# Altium PCB Macropad2023.PcbDoc
Units mil, origin at the board's own origin, x right, y up, seen from the top; angles counter-clockwise.
Board outline 6000 x 4000 mil, 2 copper layers (Top Layer, Bottom Layer); 26 components, 22 nets, 183 pads, 0 vias.
Unrouted connection lines stored in the file: 25.
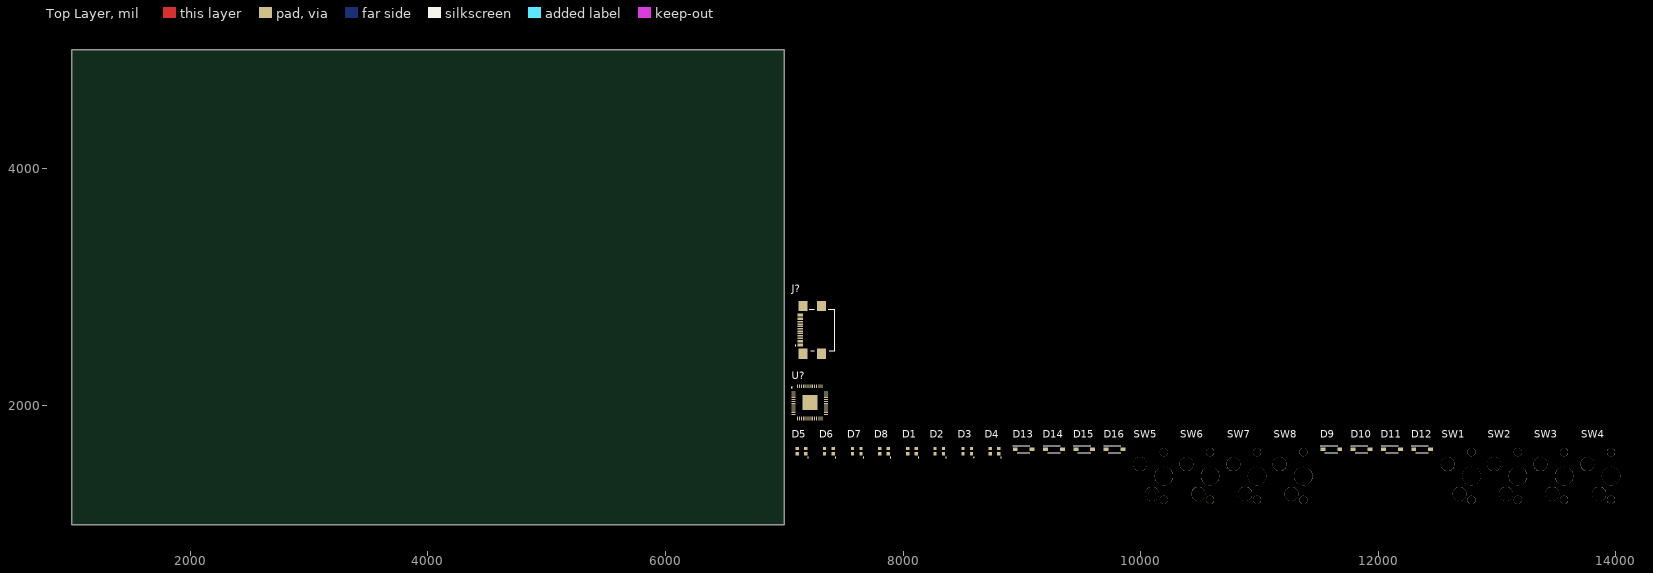
[diagram p0: Top Layer view]
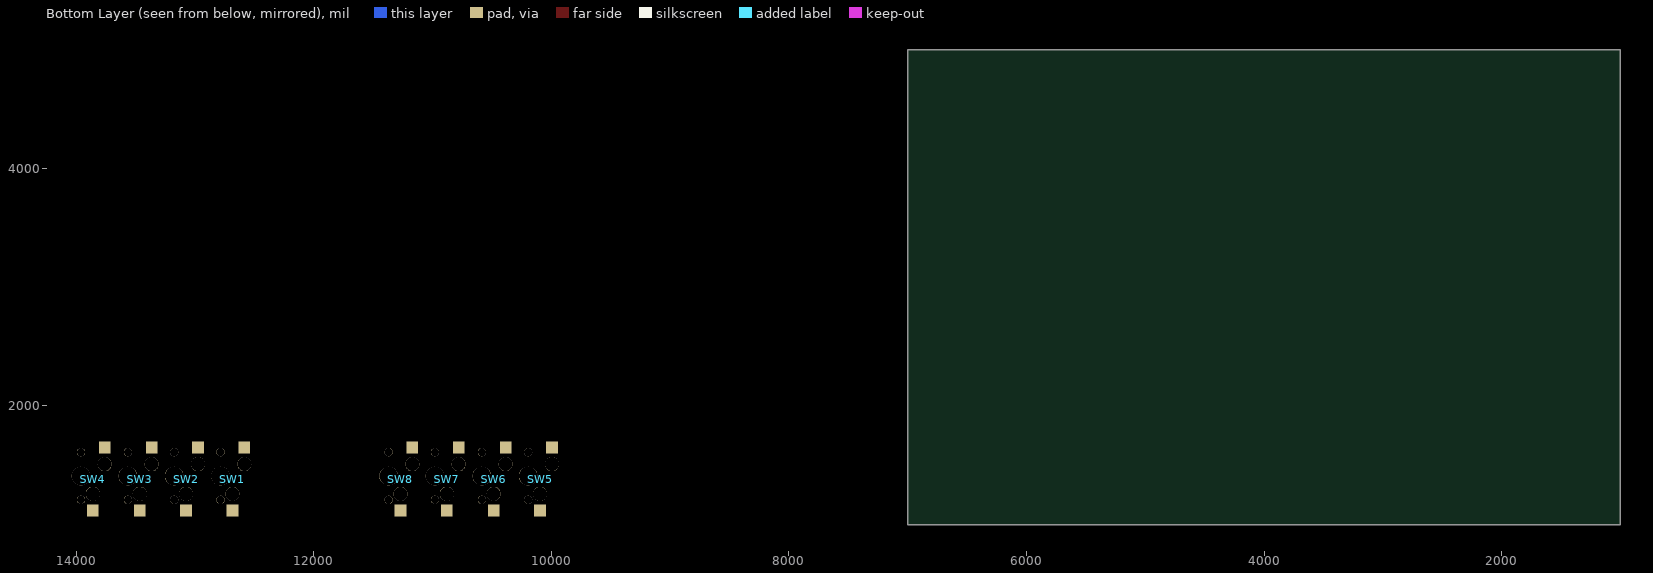
[diagram p1: Bottom Layer view, seen from below]

## Layer stack, top to bottom
Top Solder: solder mask 0.4, Solder Resist, Dk 3.5
Top Layer: signal copper 1.4
Dielectric 1: dielectric 12.6, FR-4, Dk 4.8
Bottom Layer: signal copper 1.4
Bottom Solder: solder mask 0.4, Solder Resist, Dk 3.5

## Board outline
1000,1000 7000,1000 7000,5000 1000,5000

## Design rules (kind name [scope] priority, off if disabled: settings)
Clearance [All] p1: gap=10 ignorepadtopadclearanceinfootprint=FALSE except(0: Arc-Hole Track-Hole SMDPad-Hole THPad-Hole Via-Hole Fill-Hole Poly-Hole Region-Hole Text-Hole)
PolygonConnect [All] p1: connectstyle=Relief reliefconductorwidth=10 reliefentries=4 polygonreliefangle="90 Angle" airgapwidth=10
RoutingVias [All] p1: holewidth=28 width=50 viastyle="Through Hole" minholewidth=28 minwidth=50 maxholewidth=28 maxwidth=50
SolderMaskExpansion [All] p1: expansion=4 istentingtop=FALSE
Width [All] p1: maxlimit=10 minlimit=10 preferedwidth=10
30 further rules are at their usual default settings.

## Classes and differential pairs
component class "Title Block": *
component class MCU: * U?

## Components (designator, comment, footprint, x,y, rotation, side; value= is the part's Value field where it differs from the comment)
D1 "WS2812B-2020" WS2812B2020 8075,1620 r0 top
D2 "WS2812B-2020" WS2812B2020 8305,1620 r0 top
D3 "WS2812B-2020" WS2812B2020 8540,1620 r0 top
D4 "WS2812B-2020" WS2812B2020 8770,1620 r0 top
D5 "WS2812B-2020" WS2812B2020 7145,1620 r0 top
D6 "WS2812B-2020" WS2812B2020 7375,1620 r0 top
D7 "WS2812B-2020" WS2812B2020 7610,1620 r0 top
D8 "WS2812B-2020" WS2812B2020 7840,1620 r0 top
D9 "1N4148W-TP" SOD3715X135N 11605,1635 r0 top
D10 "1N4148W-TP" SOD3715X135N 11860,1635 r0 top
D11 "1N4148W-TP" SOD3715X135N 12115,1635 r0 top
D12 "1N4148W-TP" SOD3715X135N 12370,1635 r0 top
D13 "1N4148W-TP" SOD3715X135N 9015,1635 r0 top
D14 "1N4148W-TP" SOD3715X135N 9270,1635 r0 top
D15 "1N4148W-TP" SOD3715X135N 9525,1635 r0 top
D16 "1N4148W-TP" SOD3715X135N 9780,1635 r0 top
J? "USB4110-GF-A" USB4110GFA 7280,2640 r90 top
SW1 "Cherry-MX" CHERRYMX_1.00U_HOTSWAP_NOSILK 12785,1410 r90 top
SW2 "Cherry-MX" CHERRYMX_1.00U_HOTSWAP_NOSILK 13175,1410 r90 top
SW3 "Cherry-MX" CHERRYMX_1.00U_HOTSWAP_NOSILK 13565,1410 r90 top
SW4 "Cherry-MX" CHERRYMX_1.00U_HOTSWAP_NOSILK 13960,1410 r90 top
SW5 "Cherry-MX" CHERRYMX_1.00U_HOTSWAP_NOSILK 10195,1410 r90 top
SW6 "Cherry-MX" CHERRYMX_1.00U_HOTSWAP_NOSILK 10585,1410 r90 top
SW7 "Cherry-MX" CHERRYMX_1.00U_HOTSWAP_NOSILK 10980,1410 r90 top
SW8 "Cherry-MX" CHERRYMX_1.00U_HOTSWAP_NOSILK 11370,1410 r90 top
U? "SC0914_7_" QFN40P700X700X90-57N-D 7215,2030 r0 top

## Footprints (in the part's own frame and the unit in brackets; to place one, negate y for a bottom-side part, rotate by r counter-clockwise, add the part's x,y. Pads: shape width x height; smd on the part's side, far side on the other; paste and mask are expansions set on the pad)
CHERRYMX_1.00U_HOTSWAP_NOSILK [mm]
  rect 2.55x2.5 smd far side: 1(-7.36,2.54) 2(6.09,5.08)
  round 1.75 hole 1.75 mask+0.05: ""(-5.08,0) ""(5.08,0)
  round 3 hole 3 mask+0.05: ""(-3.81,2.54) ""(2.54,5.08)
  round 4 hole 4 mask+0.05: ""(0,0)
QFN40P700X700X90-57N-D [mm]
  rect 0.85x0.2 smd: 1(-3.45,2.6) 2(-3.45,2.2) 3(-3.45,1.8) 4(-3.45,1.4) 5(-3.45,1) 6(-3.45,0.6) 7(-3.45,0.2) 8(-3.45,-0.2) 9(-3.45,-0.6) 10(-3.45,-1) 11(-3.45,-1.4) 12(-3.45,-1.8) 13(-3.45,-2.2) 14(-3.45,-2.6) 29(3.45,-2.6) 30(3.45,-2.2) 31(3.45,-1.8) 32(3.45,-1.4) 33(3.45,-1) 34(3.45,-0.6) 35(3.45,-0.2) 36(3.45,0.2) 37(3.45,0.6) 38(3.45,1) 39(3.45,1.4) 40(3.45,1.8) 41(3.45,2.2) 42(3.45,2.6)
  rect 0.2x0.85 smd: 15(-2.6,-3.45) 16(-2.2,-3.45) 17(-1.8,-3.45) 18(-1.4,-3.45) 19(-1,-3.45) 20(-0.6,-3.45) 21(-0.2,-3.45) 22(0.2,-3.45) 23(0.6,-3.45) 24(1,-3.45) 25(1.4,-3.45) 26(1.8,-3.45) 27(2.2,-3.45) 28(2.6,-3.45) 43(2.6,3.45) 44(2.2,3.45) 45(1.8,3.45) 46(1.4,3.45) 47(1,3.45) 48(0.6,3.45) 49(0.2,3.45) 50(-0.2,3.45) 51(-0.6,3.45) 52(-1,3.45) 53(-1.4,3.45) 54(-1.8,3.45) 55(-2.2,3.45) 56(-2.6,3.45)
  rect 3.2x3.2 smd: 57(0,0)
  silkscreen extent -3.97,3.1 -3.78,3.3, body extent -3.55,-3.55 3.55,3.55, height 0.9
SOD3715X135N [mm]
  rect 1.05x0.75 smd: 1(-1.8,0) 2(1.8,0)
  silkscreen extent -2.32,-0.76 1.35,0.76, body extent -1.85,-0.76 1.85,0.76, height 1.35
USB4110GFA [mm]
  rect 0.3x1.15 smd: A1(-3.35,3.678) A4(-2.55,3.678) A5(-1.25,3.678) A6(-0.25,3.678) A7(0.25,3.678) A8(1.25,3.678) A9(2.55,3.678) A12(3.35,3.678) B1(3.05,3.678) B4(2.25,3.678) B5(1.75,3.678) B6(0.75,3.678) B7(-0.75,3.678) B8(-1.75,3.678) B9(-2.25,3.678) B12(-3.05,3.678)
  round 0.325 hole 0.65 unplated: MH1(-2.89,2.603) MH2(2.89,2.603)
  rect 2.18x2 smd: MP1(-5.11,-0.827) MP2(5.11,-0.827) MP3(-5.11,3.103) MP4(5.11,3.103)
  silkscreen extent -4.5,-3.68 4.47,4.75, body extent -5.65,-3.68 5.65,4.02, height 3.26
WS2812B2020 [mm]
  rect 0.7x0.7 smd: 1(0.915,-0.55) 2(0.915,0.55) 3(-0.915,0.55) 4(-0.915,-0.55)
  silkscreen extent 1.35,-1.4 1.45,-1.3, body extent -1.1,-1 1.1,1, height 0.84

## Part data
D1 D2 D3 D4 D5 D6 D7 D8: "LED (Multiple)", Manufacturer_Name=Worldsemi, Datasheet Link=https://www.alldatasheet.com/datasheet-pdf/pdf/1134522/WORLDSEMI/WS2812B-2020.html, Height=0.84mm, Manufacturer_Part_Number=WS2812B-2020
D9 D10 D11 D12 D13 D14 D15 D16: "Diode", Manufacturer_Name=MCC, Mouser Part Number=833-1N4148W-TP, Arrow Part Number=1N4148W-TP, Arrow Price/Stock=https://www.arrow.com/en/products/1n4148w-tp/micro-commercial-components?region=europe, Datasheet Link=https://mccsemi.com/pdf/Products/1N4148W(SOD-123).pdf, Height=1.35mm, Manufacturer_Part_Number=1N4148W-TP, Mouser Price/Stock=https://www.mouser.co.uk/ProductDetail/Micro-Commercial-Components-MCC/1N4148W-TP?qs=KFo7JewZbUH7wCMabJ4EeQ%3D%3D
J?: "Connector", Manufacturer_Name="GCT (GLOBAL CONNECTOR TECHNOLOGY)", Datasheet Link=https://gct.co/files/drawings/usb4110.pdf, Height=3.26mm, Manufacturer_Part_Number=USB4110-GF-A
U?: "Connector", Manufacturer_Name=RASPBERRY-PI, Manufacturer_Part_Number=SC0914(7), Mouser Part Number=358-SC09147, Datasheet Link=https://www.mouser.com/datasheet/2/635/rp2040_datasheet-3048960.pdf, Height=0.9mm, Mouser Price/Stock=https://www.mouser.co.uk/ProductDetail/Raspberry-Pi/SC09147?qs=T%252BzbugeAwjhSpdbCB4ve%252Bg%3D%3D

## Nets (pads, with @x,y where several pads share a name; then routed paths per layer and width w, separated by ;. In a path a pad name is that pad's centre, name@x,y a point inside that pad or via, vN(x,y) a via of type N, cw(c..) or ccw(c..) an arc to the next point about the centre after c; other vN are vias at no path point)
NetD1_1: D1.1 D2.3
NetD1_3: D1.3
NetD2_1: D2.1 D3.3
NetD3_1: D3.1 D4.3
NetD4_1: D4.1 D5.3
NetD5_1: D5.1 D6.3
NetD6_1: D6.1 D7.3
NetD7_1: D7.1 D8.3
NetD9_1: D9.1 D10.1 D11.1 D12.1
NetD9_2: D9.2 SW1.1
NetD10_2: D10.2 SW2.1
NetD11_2: D11.2 SW3.1
NetD12_2: D12.2 SW4.1
NetD13_1: D13.1 D14.1 D15.1 D16.1
NetD13_2: D13.2 SW5.1
NetD14_2: D14.2 SW6.1
NetD15_2: D15.2 SW7.1
NetD16_2: D16.2 SW8.1
NetSW1_2: SW1.2 SW5.2
NetSW2_2: SW2.2 SW6.2
NetSW3_2: SW3.2 SW7.2
NetSW4_2: SW4.2 SW8.2
pads on no net: D1.2 D1.4 D2.2 D2.4 D3.2 D3.4 D4.2 D4.4 D5.2 D5.4 D6.2 D6.4 D7.2 D7.4 D8.1 D8.2 D8.4 J?.A1 J?.A4 J?.A5 J?.A6 J?.A7 J?.A8 J?.A9 J?.A12 J?.B1 J?.B4 J?.B5 J?.B6 J?.B7 J?.B8 J?.B9 J?.B12 J?.MH1 J?.MH2 J?.MP1 J?.MP2 J?.MP3 J?.MP4 SW1. SW2. SW3. SW4. SW5. SW6. SW7. SW8. U?.1 U?.2 U?.3 U?.4 U?.5 U?.6 U?.7 U?.8 U?.9 U?.10 U?.11 U?.12 U?.13 U?.14 U?.15 U?.16 U?.17 U?.18 U?.19 U?.20 U?.21 U?.22 U?.23 U?.24 U?.25 U?.26 U?.27 U?.28 U?.29 U?.30 U?.31 U?.32 U?.33 U?.34 U?.35 U?.36 U?.37 U?.38 U?.39 U?.40 U?.41 U?.42 U?.43 U?.44 U?.45 U?.46 U?.47 U?.48 U?.49 U?.50 U?.51 U?.52 U?.53 U?.54 U?.55 U?.56 U?.57